# Altium PCB PCB1.PcbDoc
Units mil, origin at the board's own origin, x right, y up, seen from the top; angles counter-clockwise.
Board outline 1350 x 1300 mil, 2 copper layers (Top Layer, Bottom Layer); 18 components, 22 nets, 77 pads, 16 vias.
Unrouted connection lines stored in the file: 1.
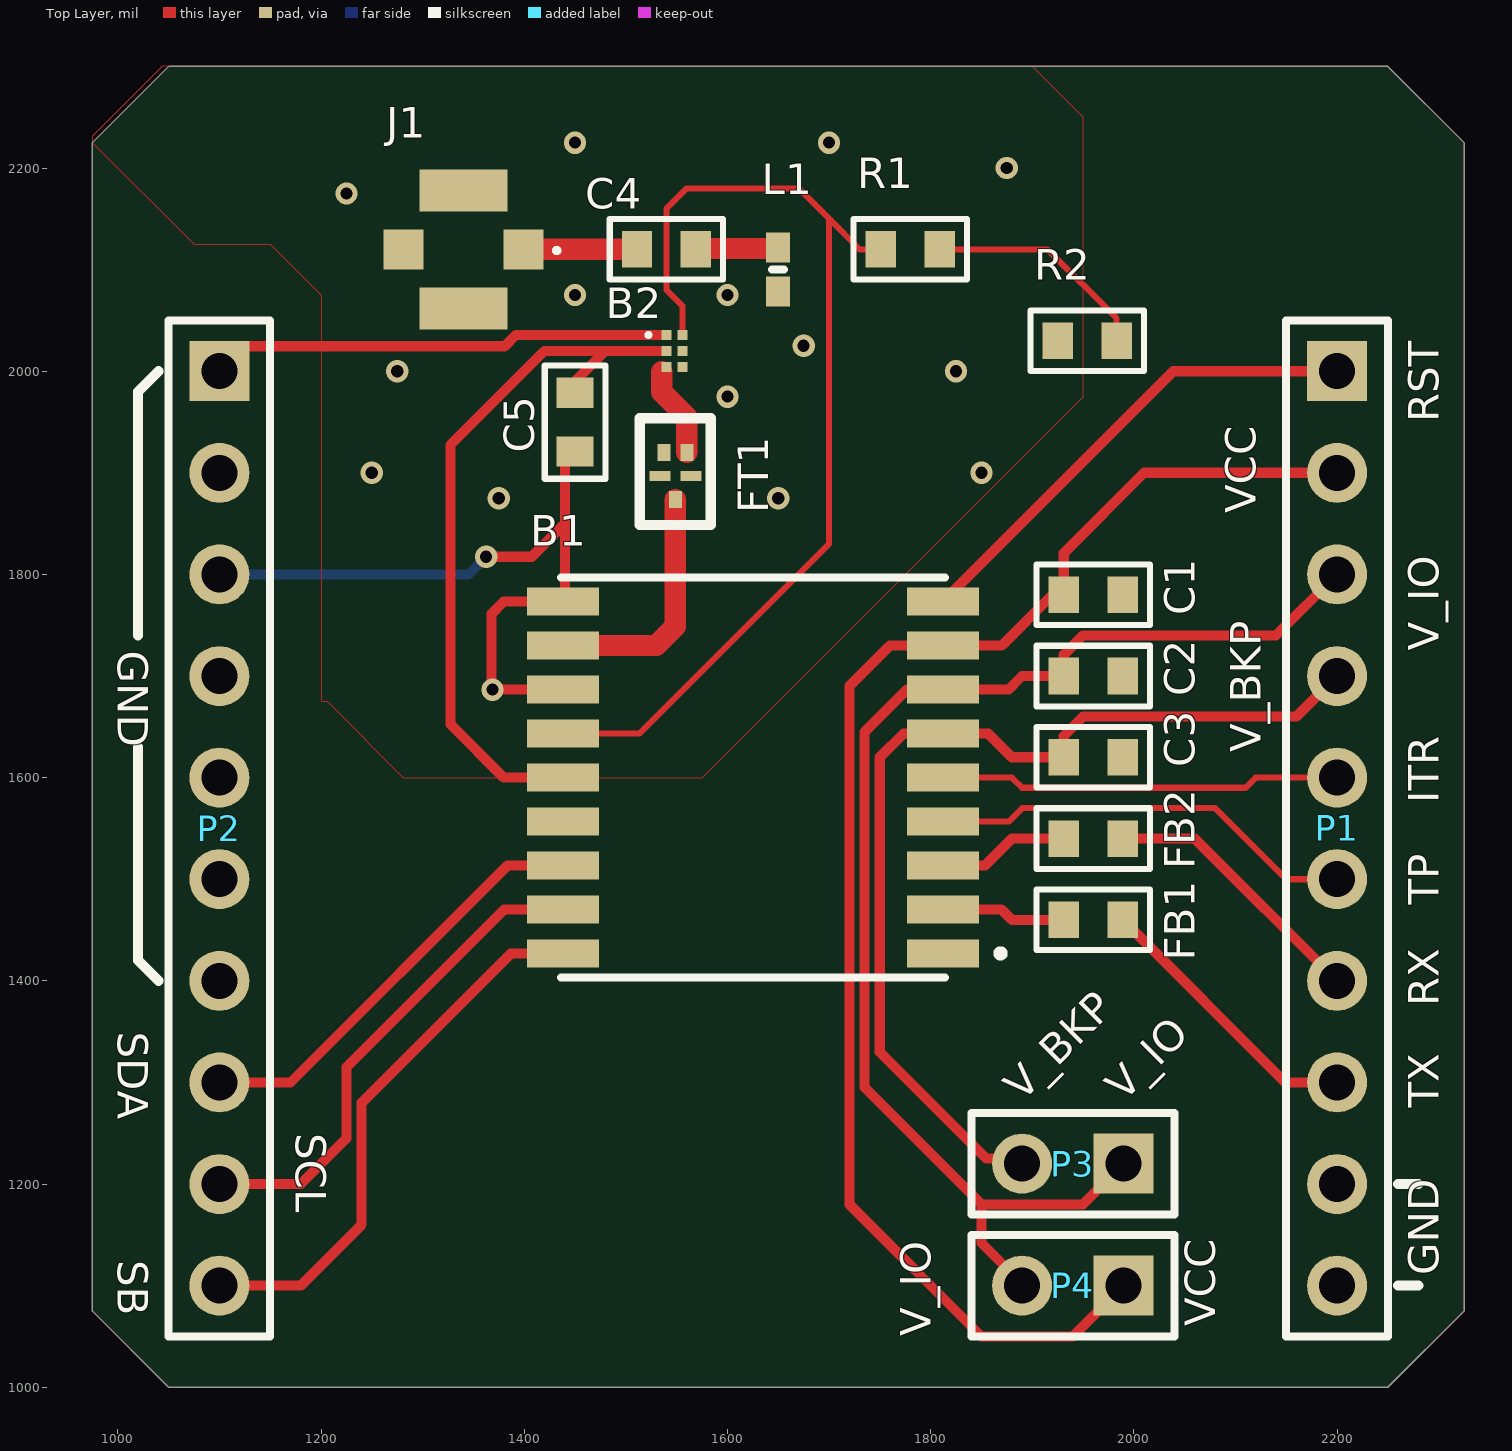
[diagram p0: Top Layer view]
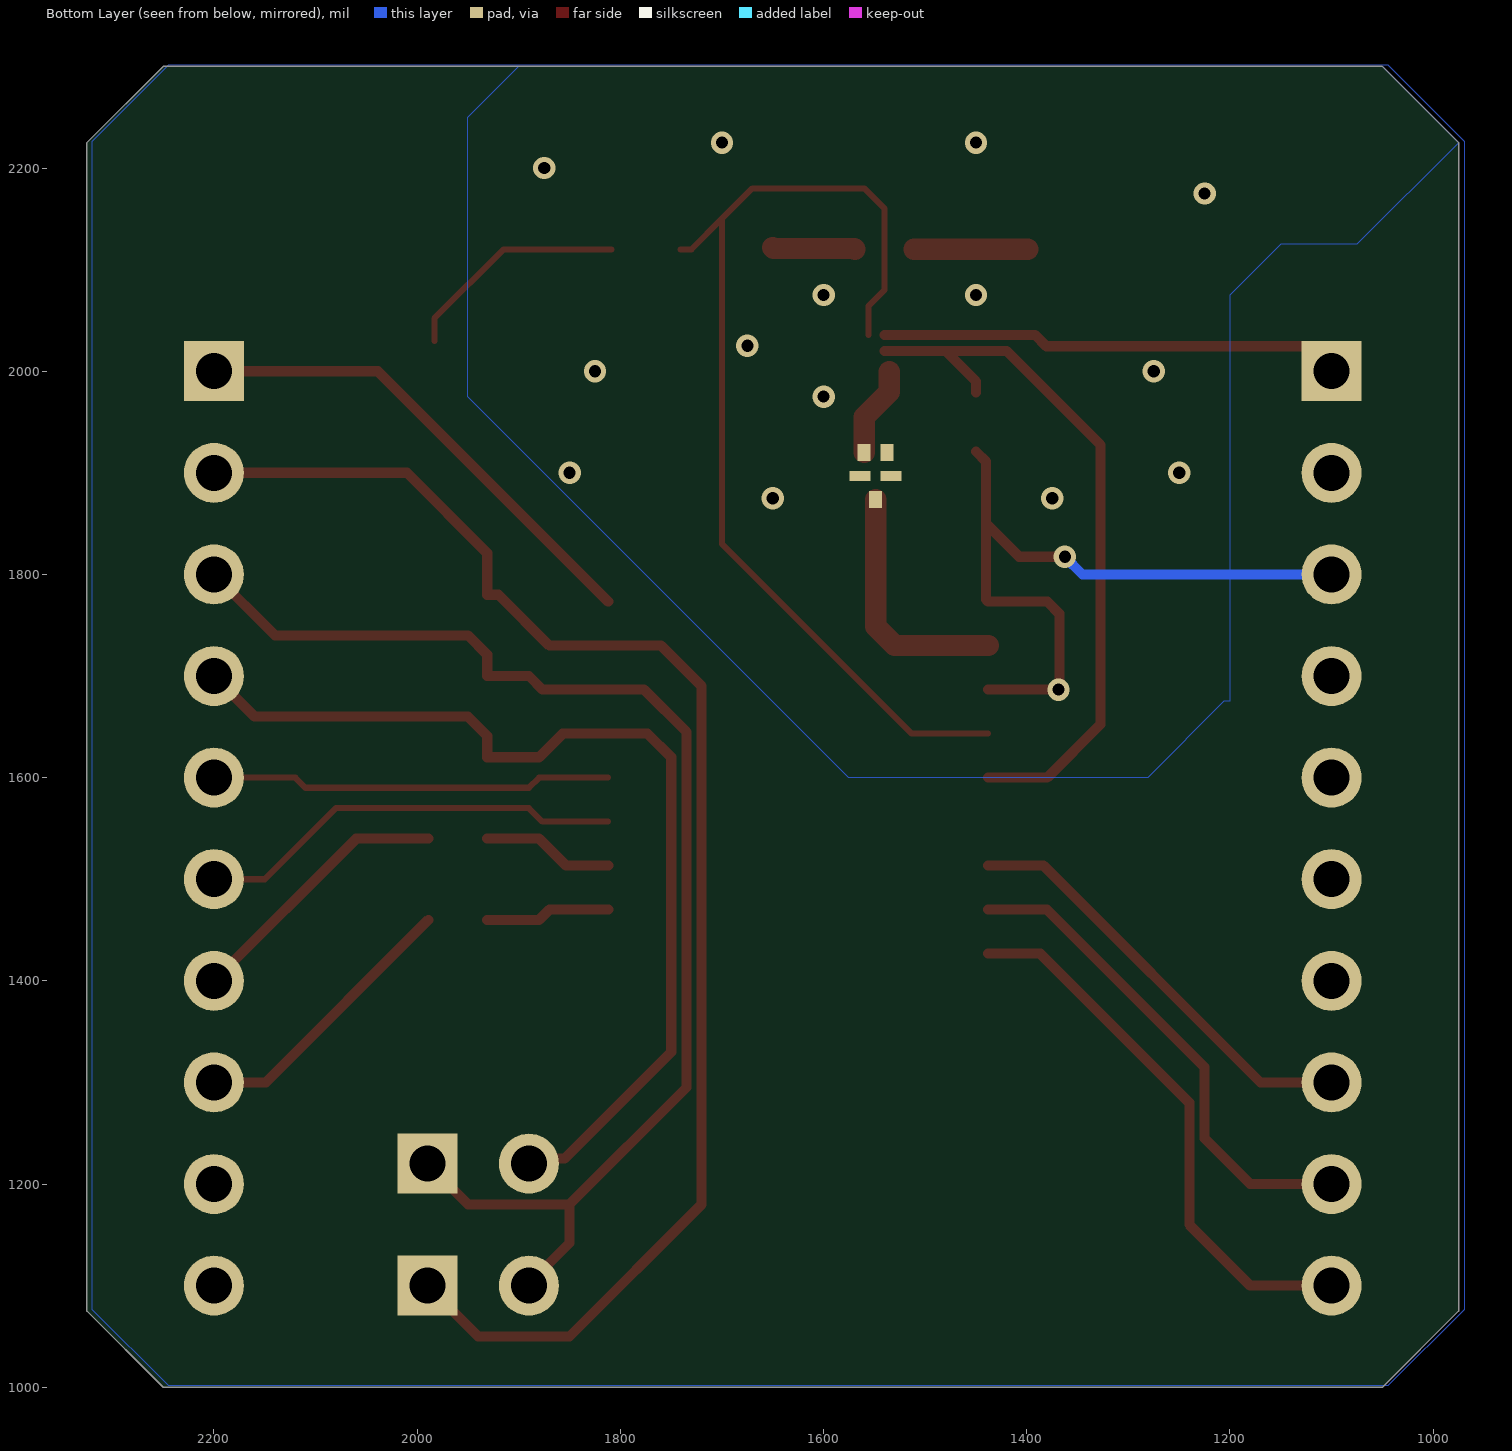
[diagram p1: Bottom Layer view, seen from below]
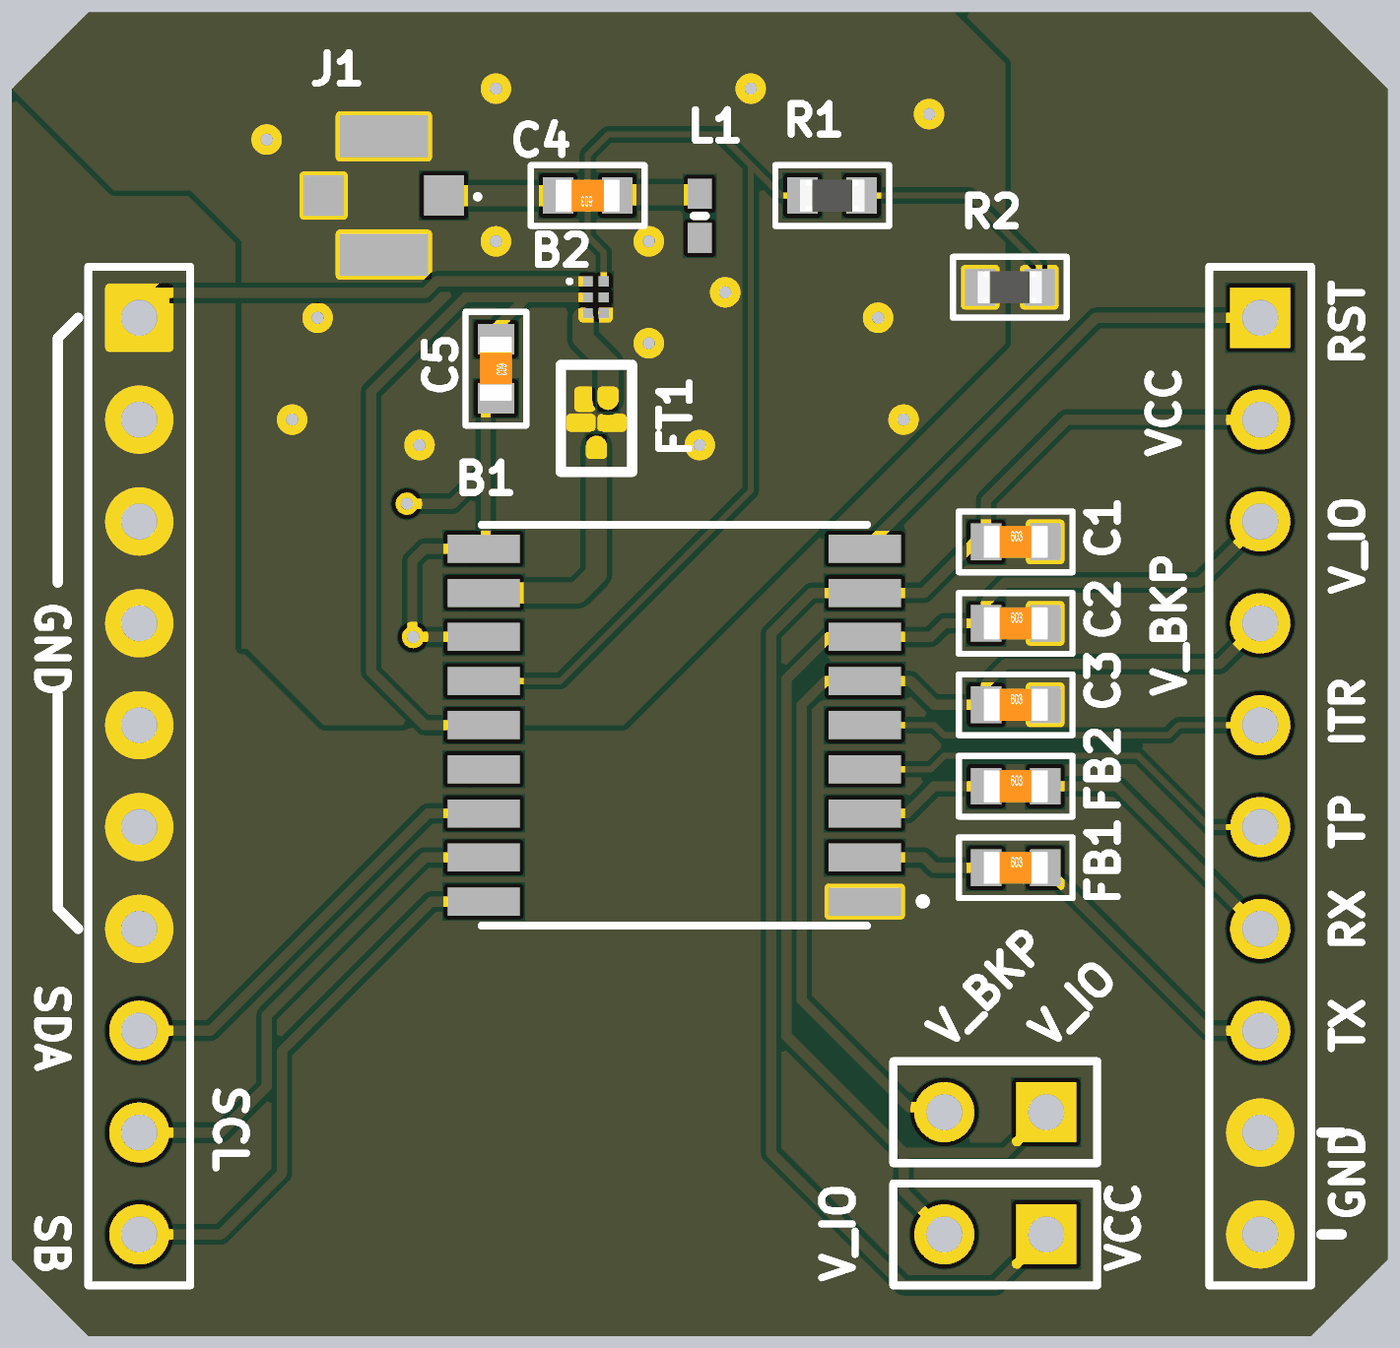
[diagram p2: 3D render of the assembled board from above, using the file's embedded part models]

## Layer stack, top to bottom
Top Solder: solder mask 0.4, Solder Resist, Dk 3.5
Top Layer: signal copper 1.3778
Dielectric 1: dielectric 12.6, FR-4, Dk 4.8
Bottom Layer: signal copper 1.3778
Bottom Solder: solder mask 0.4, Solder Resist, Dk 3.5

## Board outline
975,1075 975,2225 1050,2300 2250,2300 2325,2225 2325,1075 2250,1000 1050,1000

## Design rules (kind name [scope] priority, off if disabled: settings)
Clearance [All] p1: gap=5 ignorepadtopadclearanceinfootprint=FALSE
HoleSize [All] p1: absolutevalues=TRUE maxlimit=100 minlimit=12 maxpercent=80.000 minpercent=20.000
MinimumSolderMaskSliver [All] p1: minsoldermaskwidth=0
PolygonConnect [All] p1: connectstyle=Direct reliefconductorwidth=10 reliefentries=4 polygonreliefangle="90 Angle" airgapwidth=10
RoutingVias [All] p1: holewidth=12 width=22 viastyle="Through Hole" minholewidth=12 minwidth=22 maxholewidth=25 maxwidth=50
SilkToSilkClearance [All] p1: silktosilkclearance=0
SilkToSolderMaskClearance [IsPad] p1: minsilkscreentomaskgap=0 clearancetoexposedcopper=TRUE
SolderMaskExpansion [All] p1: expansion=4
Width "50_OHM WIDTH" [InNetClass('50 OHM')] p1: maxlimit=20.89 minlimit=20.89 preferedwidth=20.89 impedanceprofiledriven=TRUE impedanceprofileid={B0675612-841F-469F-B64E-9153354F67A4} minimp=50.000000 maximp=50.000000 favimp=50.000000
Width "regular trace" [All] p2: maxlimit=10 minlimit=6 preferedwidth=10
26 further rules are at their usual default settings.

## Classes and differential pairs
net class "50 OHM": NetB2_3 NetB2_5 NetC4_1 NetC4_2 RF_IN

## Components (designator, comment, footprint, x,y, rotation, side; value= is the part's Value field where it differs from the comment)
B1 "MAX-M8C-0-10" MAX-M8 1625,1600 r0 top locked
B2 "BGA725L6E6327FTSA1" BGS12SN6E6327XTSA1 1540.98,2020 r0 top
C1 "C0603" 0603CAP 1960,1780 r0 top value=0.1uF
C2 "C0603" 0603CAP 1960,1700 r0 top value=0.1uF
C3 "C0603" 0603CAP 1960,1620 r0 top value=0.1uF
C4 "C0603" 0603CAP 1540,2120 r180 top value=1nF
C5 "C0603" 0603CAP 1450,1950 r270 top value=0.1uF
FB1 "FB0603" 0603CAP 1960,1460 r0 top
FB2 "FB0603" 0603CAP 1960,1540 r0 top
FT1 "AFS14A34-1588.66-T3" AFS14A34-1588.66-T3 1548.66,1873.74 r90 top
J1 "73412-0110" 73412-0110 1340,2120 r90 top
L1 "LQW15AN7N5G00D" INDC1005X55N 1650,2100 r90 top
P1 "Header 10" HDR1X10 2200,2000 r270 top locked
P2 "Header 10" HDR1X10 1100,2000 r270 top locked
P3 "Header 2" HDR1X2 1990,1220 r180 top
P4 "Header 2" HDR1X2 1990,1100 r180 top
R1 "R0603" 0603RES 1780,2120 r180 top value=10k'
R2 "R0603" 0603RES 1954.22,2030 r0 top value=JMP

## Footprints (in the part's own frame and the unit in brackets; to place one, negate y for a bottom-side part, rotate by r counter-clockwise, add the part's x,y. Pads: shape width x height; smd on the part's side, far side on the other; paste and mask are expansions set on the pad)
0603CAP [mil] "Chip Capacitor; Body 1.6 x 0.8 mm (LxW typ)"
  rect 30x35.98 smd: 1(-29,0) 2(29,0)
  silkscreen extent -56,-30 56,30, body extent -56,-30 56,30, height 12
0603RES [mil] "Chip Resistor; Body 1.6 x 0.8 mm (LxW typ)"
  rect 30x35.98 smd: 1(-29,0) 2(29,0)
  silkscreen extent -56,-30 56,30, body extent -56,-30 56,30, height 15
73412-0110 [mm]
  rect 1x1 smd: 1(0,-1.5) 2(0,1.5)
  rect 1.05x2.2 smd: 3(-1.475,0) 4(1.475,0)
  silkscreen extent -0.05,-2.35 -0.01,-2.32
AFS14A34-1588.66-T3 [mm] "ABRACON SAW FILTER"
  rect 0.425x0.325 all layers, no hole: A(1.175,-0.288) C(0,0) E(1.175,0.288)
  rect 0.25x0.525 all layers, no hole: B(0.587,-0.387) D(0.587,0.387)
  silkscreen extent -0.64,-0.89 2.03,0.89
BGS12SN6E6327XTSA1 [mm]
  rect 0.25x0.25 smd: 1(-0.025,0.4) 2(-0.025,0) 3(-0.025,-0.4) 4(0.375,-0.4) 5(0.375,0) 6(0.375,0.4)
  silkscreen extent -0.53,0.35 -0.43,0.45
HDR1X2 [mm] "Connector; Header; 2 Position"
  rect 1.5x1.5 hole 0.9: 1(0,0)
  round 1.5 hole 0.9: 2(2.54,0)
  silkscreen extent -1.27,-1.27 3.81,1.27
HDR1X10 [mm] "Connector; Header; 10 Position"
  rect 1.5x1.5 hole 0.9: 1(0,0)
  round 1.5 hole 0.9: 2(2.54,0) 3(5.08,0) 4(7.62,0) 5(10.16,0) 6(12.7,0) 7(15.24,0) 8(17.78,0) 9(20.32,0) 10(22.86,0)
  silkscreen extent -1.27,-1.27 24.13,1.27
INDC1005X55N [mm]
  rect 0.75x0.6 smd: 1(-0.55,0) 2(0.55,0)
  silkscreen extent 0,-0.15 0,0.15
MAX-M8 [mm]
  rect 1.8x0.7 smd: 1(4.75,-4.4) 2(4.75,-3.3) 3(4.75,-2.2) 4(4.75,-1.1) 5(4.75,0) 6(4.75,1.1) 7(4.75,2.2) 8(4.75,3.3) 9(4.75,4.4) 10(-4.75,4.4) 11(-4.75,3.3) 12(-4.75,2.2) 13(-4.75,1.1) 14(-4.75,0) 15(-4.75,-1.1) 16(-4.75,-2.2) 17(-4.75,-3.3) 18(-4.75,-4.4)
  silkscreen extent -4.8,-5 6.27,5

## Part data
B1: "u-blox M8 concurrent GNSS module", Manufacturer_Name=U-Blox, Datasheet Link=https://www.u-blox.com/sites/default/files/MAX-M8-FW3_DataSheet_%28UBX-15031506%29.pdf, Manufacturer_Part_Number=MAX-M8C-0-10
B2: "INFINEON - BGA725L6E6327FTSA1 - RF AMP, 20DB, 1.615GHZ, 3.6V, TSLP-6", Manufacturer_Name=Infineon, Mouser Part Number=726-BGA725L6E6327FTS, Datasheet Link=https://www.infineon.com/dgdl/Infineon-BGA725L6-DS-v02_00-en.pdf?fileId=db3a30433784a0400137ef9a4d341f23, Manufacturer_Part_Number=BGA725L6E6327FTSA1, Mouser Price/Stock=https://www.mouser.com/Search/Refine.aspx?Keyword=726-BGA725L6E6327FTS
C1 C2 C3 C4 C5: "0603 Ceramic Chip Capacitor - Standard"
FB1 FB2: "0603 Multilayer Ferrite Power Bead", Manufacturer="KOA Speer", Manufacturer P/N=CZP1JFTTD121P, Resistance @ 100MHz=120, Price=0.15, Vendor=Mouser, Vendor P/N=660-CZP1JFTTD121P
FT1: "SAW FILTER", Manufacturer="Abracon LLC", COMPONENT LINK 1=https://abracon.com/Filters/SAW%20FILTERS/AFS14A34-1588.66-T3.pdf, DIGIKEY PN=535-13421-1-ND, MANUFACTURER PN=AFS14A34-1588.66-T3
J1: "50 Ohms, MCRF, PCB Vertical Jack Receptacle, SMT, 1.25mm Mounted Height", Manufacturer_Name=Molex, Mouser Part Number=538-73412-0110, RS Part Number=1676350, Allied_Number=70357960, Allied Price/Stock=https://www.alliedelec.com/molex-incorporated-73412-0110/70357960/, Datasheet Link=http://www.molex.com/pdm_docs/sd/734120110_sd.pdf, Manufacturer_Part_Number=73412-0110, Mouser Price/Stock=https://www.mouser.com/Search/Refine.aspx?Keyword=538-73412-0110, RS Price/Stock=http://uk.rs-online.com/web/p/products/1676350
L1: "Inductor SMD 0402 7.5nH 570mA Murata LQW15A Series Wire-wound SMD Inductor with a Ferrite Core, 0.0075 uH +/-2% 570mA Idc Q:25", Manufacturer_Name="Murata Electronics", Mouser Part Number=81-LQW15AN7N5G00D, RS Part Number=7926473P, Datasheet Link=http://uk.rs-online.com/web/p/products/7926473, Geometry.Height=0.55mm, Manufacturer_Part_Number=LQW15AN7N5G00D, Mouser Price/Stock=https://www.mouser.com/Search/Refine.aspx?Keyword=81-LQW15AN7N5G00D, RS Price/Stock=http://uk.rs-online.com/web/p/products/7926473P
P1 P2: "Header, 10-Pin", LatestRevisionDate=17-Jul-2002, LatestRevisionNote="Re-released for DXP Platform.", Publisher="Altium Limited"
P3 P4: "Header, 2-Pin", LatestRevisionDate=17-Jul-2002, LatestRevisionNote="Re-released for DXP Platform.", Publisher="Altium Limited"
R1 R2: "0603 Chip Resistor - Standard"

## Via types
v1: diameter 22, hole 12, Top Layer to Bottom Layer, 16 vias

## Nets (pads, with @x,y where several pads share a name; then routed paths per layer and width w, separated by ;. In a path a pad name is that pad's centre, name@x,y a point inside that pad or via, vN(x,y) a via of type N, cw(c..) or ccw(c..) an arc to the next point about the centre after c; other vN are vias at no path point)
/RESET: B1.9 P1.1 | length 481.9
  Top Layer w10: B1.9 2038.78,2000 P1.1
/SAFEBOOT: B1.18 P2.10 | length 543.6
  Top Layer w10: P2.10 1180,1100 1240,1160 1240,1280 1386.77,1426.77 B1.18
EXTINT: B1.5 P1.5 | length 396.3
  Top Layer w6: B1.5 1880,1600 1890,1590 2110,1590 2120,1600 P1.5
GND: B1.1 B1.10 B1.12 B2.1 C1.2 C2.2 C3.2 C5.2 P1.9 P1.10 P2.1 P2.2 P2.3 P2.4 P2.5 P2.6 P2.7 R1.1 R2.2 | length 1411.8
  Top Layer w6: R1.1 1915,2120 1983,2052 R2.2@1983,2030
  Top Layer w10: P2.1 1124.53,2024.53 1380.72,2024.53 1391.94,2035.75 B2.1 ; v1(1362.51,1817.41) 1407.41,1817.41 1440,1850 ; B1.12 v1(1368.76,1686.61) 1367.91,1687.47 1367.91,1761.45 1379.68,1773.23 B1.10 1440,1775.24 1440,1850 ; C5.2 1440,1911 1440,1850
  Bottom Layer w10: P2.3 1345.1,1800 v1(1362.51,1817.41)
LNA_EN: B1.13 B2.6 R1.2 | length 1024.3
  Top Layer w6: B1.13 1513.31,1643.31 1700,1830 1700,2150 ; B2.6 1555.75,2064.25 1540,2080 1540,2160 1560,2180 1670,2180 1700,2150 ; R1.2@1741,2120 1730,2120 1700,2150
NetB2_3: B2.3 FT1.A | length 89.8
  Top Layer w20.89: B2.3@1535.38,1999.56 1535.38,1979.62 1560,1955 FT1.A
NetB2_5: B2.5 L1.1
NetC4_1: C4.1 L1.2 | length 81.7
  Top Layer w20.89: C4.1 1569.83,2120.83 1649.17,2120.83 L1.2
NetC4_2: C4.2 J1.1 | length 111.9
  Top Layer w20.89: J1.1 C4.2
RF_GND: B2.4 FT1.B FT1.D FT1.E J1.2 J1.3 J1.4 R2.1
  other v1: 1375,1875 1650,1875 1250,1900 1850,1900 1600,1975 1275,2000 1825,2000 1675,2025 1450,2075 1600,2075 1225,2175 1875,2200 1450,2225 1700,2225
RF_IN: B1.11 FT1.C | length 243.5
  Top Layer w20.89: B1.11 1529.92,1729.92 1548.66,1748.66 FT1.C
RX: FB2.2 P1.7 | length 269
  Top Layer w10: FB2.2 2060,1540 P1.7
RX_F: B1.3 FB2.1 | length 130
  Top Layer w10: B1.3 1853.39,1513.39 1880,1540 FB2.1
SCL: B1.17 P2.9 | length 490.9
  Top Layer w10: P2.9 1180,1200 1225,1245 1225,1315 1380.08,1470.08 B1.17
SDA: B1.16 P2.8 | length 426.4
  Top Layer w10: P2.8 1170,1300 1383.39,1513.39 B1.16
TIMEPULSE: B1.4 P1.6 | length 422.5
  Top Layer w6: B1.4 1876.69,1556.69 1890,1570 2080,1570 2150,1500 P1.6
TX: FB1.2 P1.8 | length 277.3
  Top Layer w10: FB1.2 2149,1300 P1.8
TX_F: B1.2 FB1.1 | length 123.2
  Top Layer w10: B1.2 1869.92,1470.08 1880,1460 FB1.1
V_BCKP: B1.6 C3.1 P1.4 P3.2 | length 990.3
  Top Layer w10: P3.2 1885,1225 1855,1225 1750,1330 1750,1620 1773.31,1643.31 B1.6 1856.69,1643.31 1880,1620 C3.1 1931,1641 1950,1660 2160,1660 P1.4
VCC: B1.8 C1.1 P1.2 P4.1 | length 1445.6
  Top Layer w10: P4.1 1940,1050 1850,1050 1720,1180 1720,1690 1759.92,1729.92 B1.8 1869.92,1729.92 1920,1780 C1.1 1931,1821 2010,1900 P1.2
VCC_IO: B1.7 C2.1 P1.3 P3.1 P4.2 | length 1322.4
  Top Layer w10: 1849.92,1180 1850,1180 ; P4.2@1874.92,1100 P4.2 1890,1102.01 1850,1142.01 1850,1180 ; P3.1 1950,1180 1850,1180 ; P1.3 2140,1740 1950,1740 1931,1721 C2.1 1890,1700 1876.61,1686.61 B1.7 1776.61,1686.61 1735,1645 1735,1295 1850,1180
VCC_RF: B1.14 B2.2 C5.1 | length 711.5
  Top Layer w10: B1.14 1380,1600 1327.51,1652.49 1327.51,1927.51 1420,2020 1480,2020 ; C5.1 1450,1990 1480,2020 ; B2.2 1480,2020
pads on no net: B1.15

## Polygon pours and split planes (outlines as drawn)
GND on Top Layer "Top Layer-No Net 2" (solid, shelved, pour order 30): 1050,1000 2250,1000 2325,1075 2325,2225 2250,2300 1043.76,2300 975,2231.24 975,1075
RF_GND on Top Layer "Top Layer-No Net" (solid, shelved, pour order 24): 1200,1675 1205.94,1675 1280.94,1600 1575,1600 1950,1975 1950,2250 1900,2300 1050,2300 975,2225 1075,2125 1150,2125 1200,2075
GND on Bottom Layer "Bottom Layer-GND" (solid, shelved, pour order 26): 969.64,2226.43 969.64,1076.43 1044.64,1001.43 2244.64,1001.43 2319.64,1076.43 2319.64,2226.43 2244.64,2301.43 1044.64,2301.43
RF_GND on Bottom Layer "Bottom Layer-RF_GND" (solid, shelved, pour order 22): 1200,1675 1205.94,1675 1280.94,1600 1575,1600 1950,1975 1950,2250 1900,2300 1050,2300 975,2225 1075,2125 1150,2125 1200,2075

## Silkscreen, mask and mechanical layers (free items; w line width, h text height)
Top Overlay:
  lines w10: 1020,1630 1020,1420 1040,1400 ; 1020,1740 1020,1980 1040,2000 ; 2260,1100 2280,1100 ; 2260,1200 2280,1200
  text "RST" at 2300,1950 h30 r90
  text "VCC" at 2120,1860 h30 r90
  text "GND" at 1000,1725 h30 r270
  text "V_IO" at 2300,1725 h30 r90
  text "V_BKP" at 2125,1625 h30 r90
  text "ITR" at 2300,1575 h30 r90
  text "TP" at 2300,1475 h30 r90
  text "RX" at 2300,1375 h30 r90
  text "SDA" at 1000,1350 h30 r270
  text "V_BKP" at 1890,1280 h30 r45
  text "V_IO" at 1990,1280 h30 r45
  text "TX" at 2300,1275 h30 r90
  text "SCL" at 1175,1250 h30 r270
  text "SB" at 1000,1125 h30 r270
  text "GND" at 2300,1110 h30 r90
  text "VCC" at 2080,1060 h30 r90
  text "V_IO" at 1800,1050 h30 r90
Mechanical 1:
  the board outline again, w10